# EAGLE board Chassis1 (EAGLE 9.6.2)
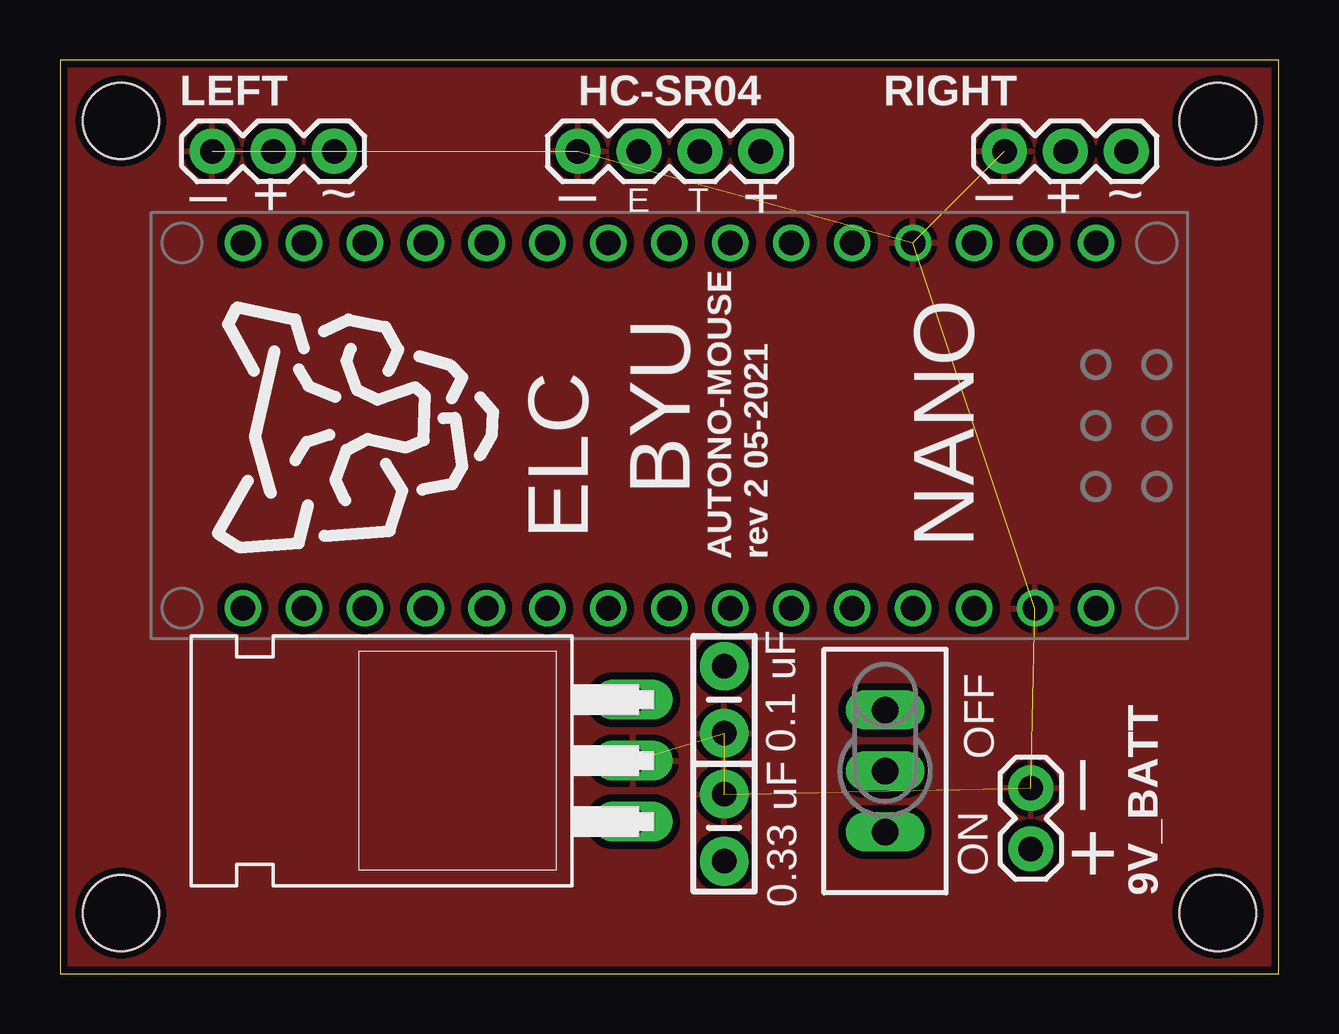
[diagram p0: board, top side]
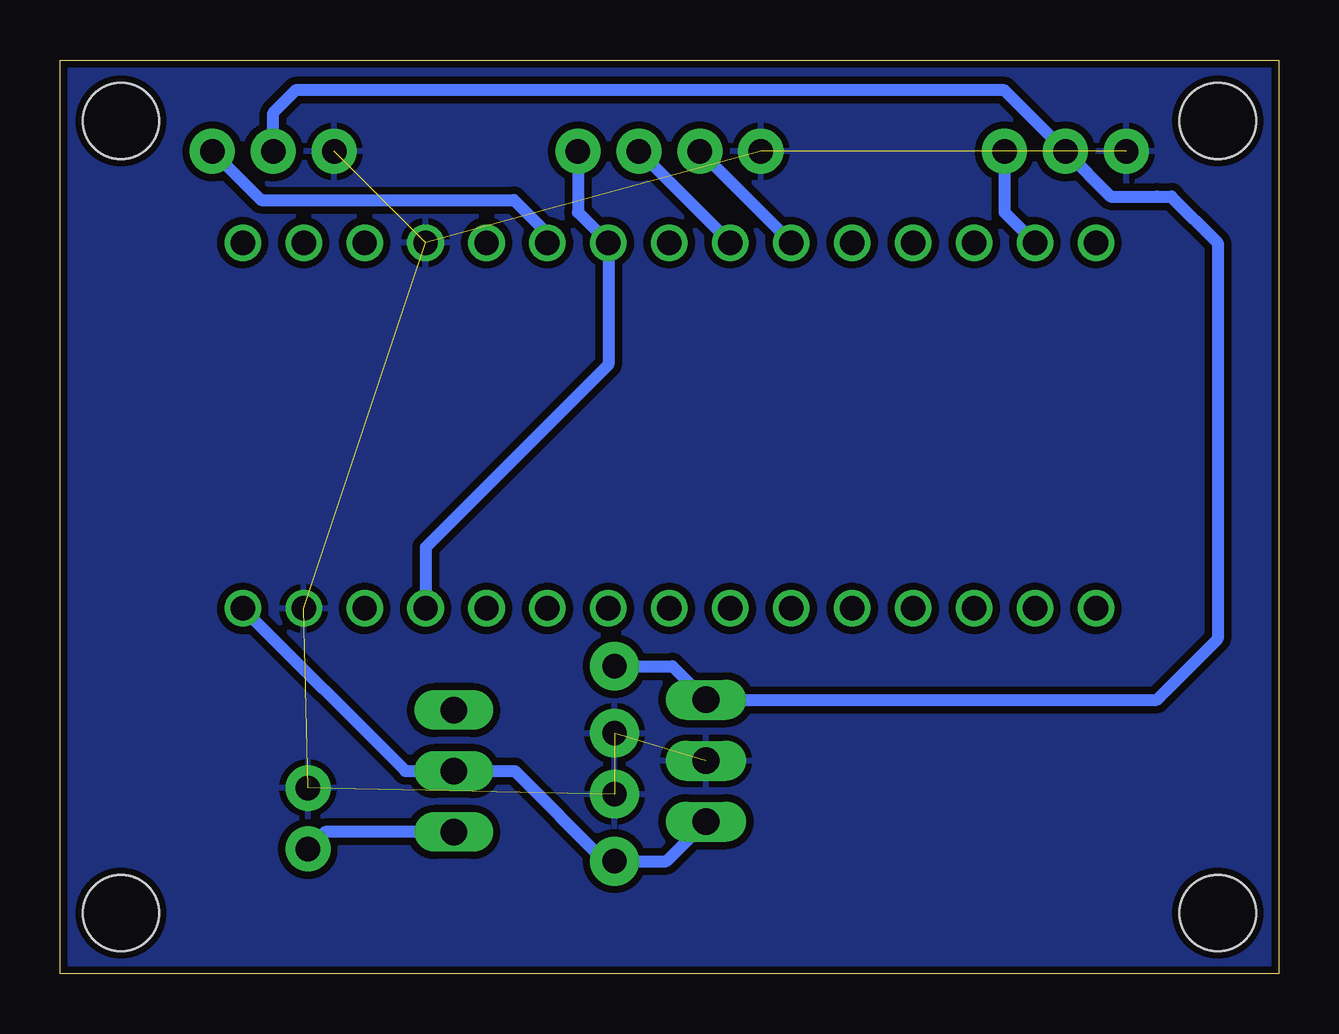
[diagram p1: board, bottom side, seen from below]

Size 50.8 x 38.1 mm. Coordinates in mm from the lower left corner, seen from the top.
Outline: 0,0 50.8,0 50.8,38.1 0,38.1 0,0
Copper layers (1*16): Top 0.035mm / dielectric 1.5mm / Bottom 0.035mm
Design rules "elcdrc": minimum track width 12mil, minimum drill 0.3mm, track to track 12mil, track to pad 12mil, pad to pad 12mil, via to via 12mil, smd to smd 6mil, copper to edge 12mil, drill to drill 12mil, minimum pad ring 10mil, minimum via ring 8mil, stop-mask expansion 4mil, vias tented up to drill 0mil, thermal gap 10mil
Holes 3.17 mm at 2.54,2.54 48.26,2.54 48.26,35.56 2.54,35.56

## Footprints (pad centres in the part's own frame; a part is rotated, then mirrored left to right if it is on the bottom)
1X02 = drill 1.016 pad 1.88: 1 0,0; 2 2.54,0
CAP-PTH-SMALL-KIT = drill 1.016 pad 2.032: 1 -1.397,0; 2 1.397,0
1X04 = drill 1.016 pad 1.88: 1 0,0; 2 2.54,0; 3 5.08,0; 4 7.62,0
1X03 = drill 1.016 pad 1.88: 1 0,0; 2 2.54,0; 3 5.08,0
NANO = drill 1.016: 1 -7.62,17.78; 2 -7.62,15.24; 3 -7.62,12.7; 4 -7.62,10.16; 5 -7.62,7.62; 6 -7.62,5.08; 7 -7.62,2.54; 8 -7.62,0; 9 -7.62,-2.54; 10 -7.62,-5.08; 11 -7.62,-7.62; 12 -7.62,-10.16; 13 -7.62,-12.7; 14 -7.62,-15.24; 15 -7.62,-17.78; 16 7.62,-17.78; 17 7.62,-15.24; 18 7.62,-12.7; 19 7.62,-10.16; 20 7.62,-7.62; 21 7.62,-5.08; 22 7.62,-2.54; 23 7.62,0; 24 7.62,2.54; 25 7.62,5.08; 26 7.62,7.62; 27 7.62,10.16; 28 7.62,12.7; 29 7.62,15.24; 30 7.62,17.78
TL3XPO = drill 1.1 pad 1.422 long: 1 -2.54,0; 2 0,0; 3 2.54,0
TO220H = drill 1.118 long: 1 -2.54,-10.16; 2 0,-10.16; 3 2.54,-10.16

## Placement (x,y rotation side)
9V_BATT  [1X02]  40.46,7.75 270 top
C1  0.33uF  [CAP-PTH-SMALL-KIT]  27.69,6.1 90 top
C2  0.1uF  [CAP-PTH-SMALL-KIT]  27.69,11.43 270 top
HC-SR04  [1X04]  21.59,34.29 0 top
LEFT  SERVO  [1X03]  11.43,34.29 180 top
NANO  NANO_FOOTPRINT  [NANO]  25.4,22.86 270 top
RIGHT  SERVO  [1X03]  44.45,34.29 180 top
S1  TL36PO  [TL3XPO]  34.39,8.46 270 top
U2  LM7805  [TO220H]  13.72,8.89 90 top
U$1  FRAME-BADGE  [DUMMY]  8.2,10.19 90 top

## Library data of the parts
9V_BATT = SparkFun-Connectors
C1 C2 = SparkFun-Capacitors; PROD_ID: CAP-08370
HC-SR04 = SparkFun-Connectors; PROD_ID: CONN-09696
LEFT RIGHT = SparkFun-Electromechanical
NANO = SparkFun-Boards
S1 = switch
U2 = class-parts
U$1 = AndysLib

## Nets
5V: C2.1 LEFT.2 RIGHT.2 U2.3
5V_ARD: HC-SR04.4 NANO.7 NANO.27
ECHO: HC-SR04.2 NANO.10
GND: 9V_BATT.1 C1.2 C2.2 HC-SR04.1 LEFT.3 NANO.4 NANO.29 RIGHT.3 U2.2
LEFT_SERVO: LEFT.1 NANO.14
N$1: 9V_BATT.2 S1.3
RIGHT_SERVO: NANO.6 RIGHT.1
TRIGGER: HC-SR04.3 NANO.9
VIN: C1.1 NANO.30 S1.2 U2.1

## Tracks (layer width: path | path; a pad name or v marks a point on that pad's centre or on a via)
5V
  Bottom 0.508: C2.1 25.27,12.83 U2.3 5.08,11.43 2.54,13.97 2.54,30.48 4.47,32.41 5.08,32.41 7.01,32.41 LEFT.2 11.43,36.83 40.98,36.83 41.91,35.9 RIGHT.2
5V_ARD
  Bottom 0.508: HC-SR04.4 29.21,31.75 NANO.7 27.94,25.4 35.56,17.78 NANO.27
ECHO
  Bottom 0.508: HC-SR04.2 NANO.10
GND  (8 unrouted)
  pour Bottom: 0,38.1 0,0 50.85,0 50.85,38.1
  pour Top: 0.33,38.07 50.9,38.07 50.9,0.23 0.33,0.23
LEFT_SERVO
  Bottom 0.508: LEFT.1 11.43,31.75 NANO.14
N$1
  Bottom 0.508: 9V_BATT.2 39.75,5.92 S1.3
RIGHT_SERVO
  Bottom 0.508: RIGHT.1 42.42,32.26 31.88,32.26 30.48,30.86 NANO.6
TRIGGER
  Bottom 0.508: HC-SR04.3 NANO.9
VIN
  Bottom 0.508: U2.1 25.53,4.7 C1.1 28.09,4.7 31.85,8.46 S1.2 36.4,8.46 NANO.30

## Text on the board
tPlace: _ | _ | _ | + | ~ | E | T | + | + | ~ | NANO
tNames: ELC | BYU | AUTONO-MOUSE / rev 2 05-2021 | OFF | 0.1 uF | _ | ON | + | 0.33 uF